# Altium PCB AMC_Single_uBIF.PcbDoc (part 2 of 2)
Units mm, origin at the board's own origin, x right, y up, seen from the top; angles counter-clockwise.
Board outline 54.63 x 82.6 mm, 4 copper layers (TOP, GND, PWR, BTM), stack 1.562 mm thick; 31 components, 112 nets, 322 pads, 154 vias.
Unrouted connection lines stored in the file: 186.
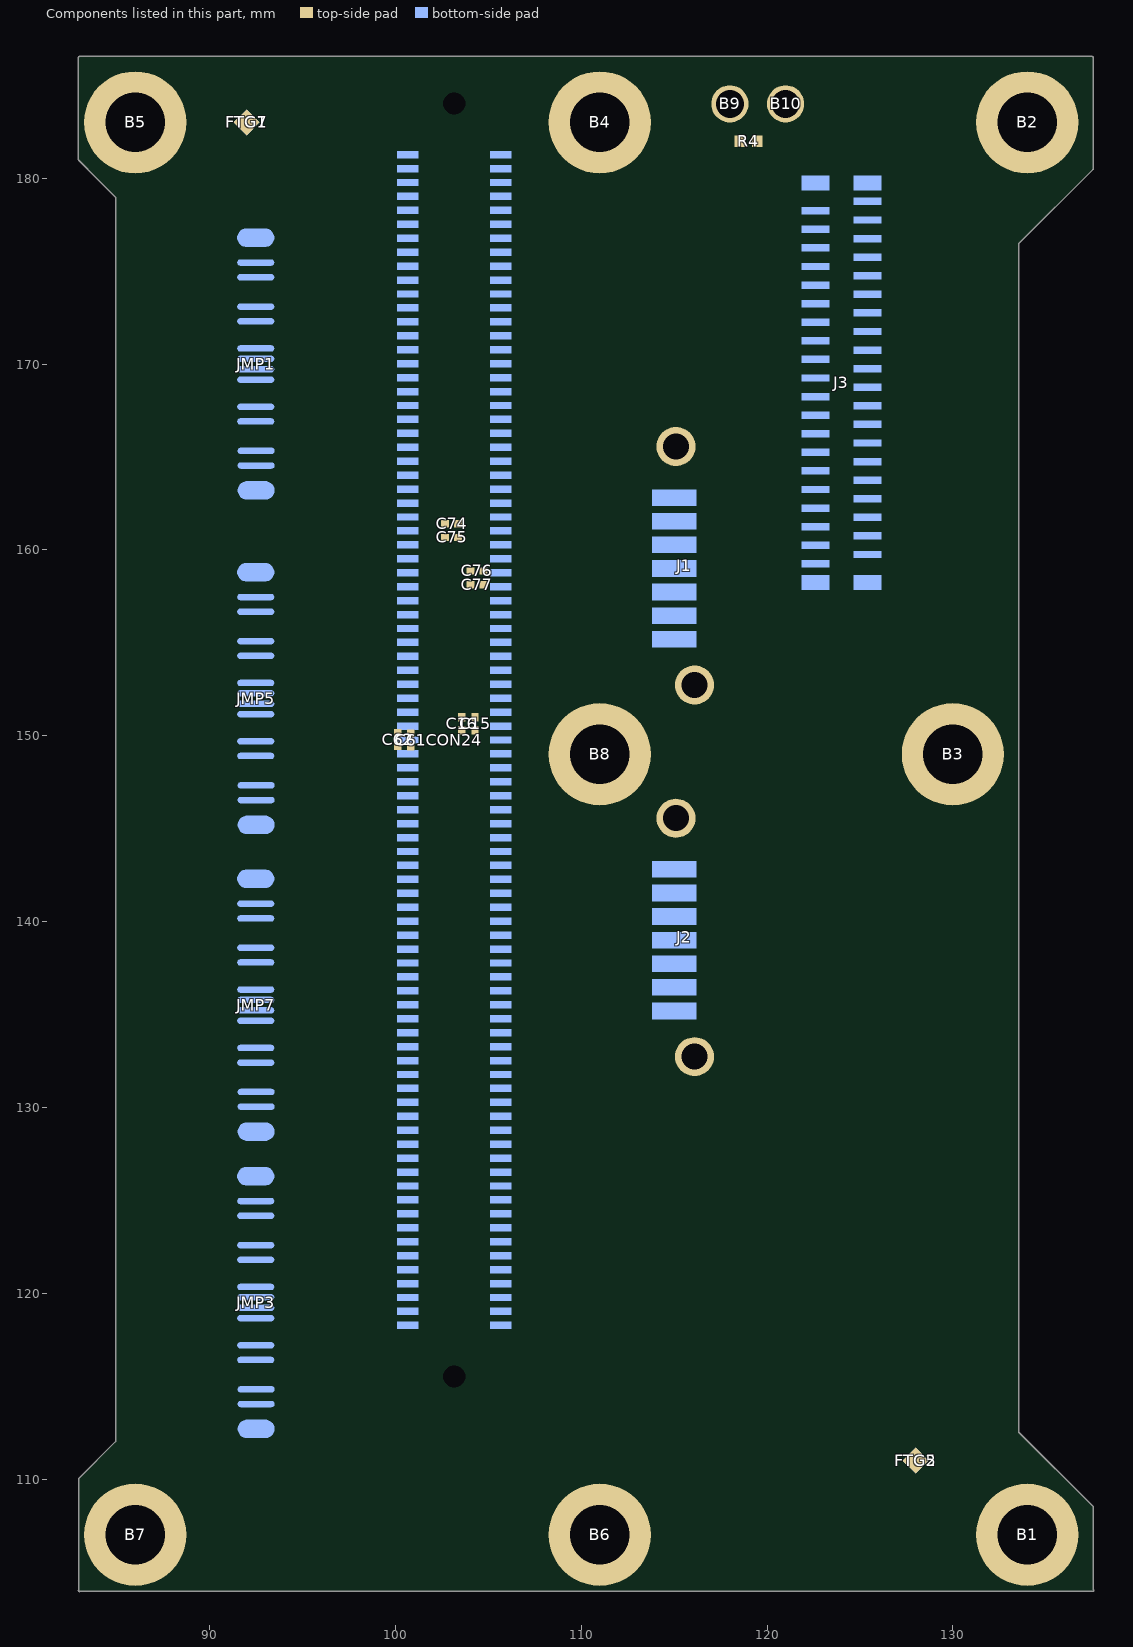
[diagram p4: the components of this part, seen from the top]

## Via types
v1: diameter 0.5, hole 0.3, TOP to BTM, tented both sides, 150 vias
v2: diameter 0.8, hole 0.5, TOP to BTM, tented both sides, 4 vias

## Nets (pads, with @x,y where several pads share a name; then routed paths per layer and width w, separated by ;. In a path a pad name is that pad's centre, name@x,y a point inside that pad or via, vN(x,y) a via of type N, cw(c..) or ccw(c..) an arc to the next point about the centre after c; other vN are vias at no path point) (continued)
copper on no net: | length 447.8
  TOP w0.11: 98.533,155.927 ccw(c99.444,156.839) 99.444,155.55 101.58,155.55 ccw(c101.58,156.611) 102.33,155.86 ; 98.56,156.61 ccw(c99.216,156.61) 98.752,156.147 ccw(c99.444,156.839) 99.444,155.86 99.602,155.86 ccw(c99.602,156.007) 99.749,156.007 cw(c99.932,156.007) 99.932,156.19 100.176,156.19 cw(c100.176,156.007) 100.359,156.007 ccw(c100.506,156.007) 100.506,155.86 100.75,155.86 101.58,155.86 ccw(c101.58,156.611) 102.112,156.08 102.191,156.159 ccw(c101.637,156.713) 102.42,156.713 102.42,158.02 cw(c103.06,158.02) 102.437,158.165 cw(c103.06,158.02) 102.915,158.643 cw(c103.06,158.02) 103.06,158.66 103.562,158.66 ccw(c103.562,159.319) 104.028,158.853 ; 98.56,156.74 cw(c99.24,156.74) 98.759,157.221 98.828,157.289 cw(c99.264,156.853) 99.264,157.47 cw(c99.264,156.719) v1(99.795,157.25) ; 98.651,157.551 cw(c99.204,156.997) 99.204,157.78 99.264,157.78 ccw(c99.264,158.531) v1(99.795,158) ; 98.878,164.028 v1(99.48,164.028) ; 98.878,164.728 v1(99.48,164.728) ; 98.878,166.278 v1(99.48,166.278) ; 98.878,166.978 v1(99.48,166.978) ; v1(99.299,159.548) 99.307,159.556 cw(c99.77,159.094) 99.77,159.748 ccw(c99.77,160.54) 100.33,159.98 100.97,160.62 cw(c101.58,160.011) 101.58,160.873 102.232,160.873 cw(c102.232,160.207) 102.703,160.678 ; v1(99.299,160.258) 99.307,160.25 ccw(c99.77,160.712) 99.77,160.058 ccw(c99.77,160.54) 100.11,160.199 ; v1@99.342,163.89 ccw(c99.009,163.557) 99.009,164.028 ccw(c99.009,164.499) v1@99.342,164.166 ; v1@99.342,164.59 ccw(c99.009,164.257) 99.009,164.728 ccw(c99.009,165.199) v1@99.342,164.866 ; v1@99.342,166.14 ccw(c99.009,165.807) 99.009,166.278 ccw(c99.009,166.749) v1@99.342,166.416 ; v1@99.342,166.84 ccw(c99.009,166.507) 99.009,166.978 ccw(c99.009,167.449) v1@99.342,167.116 ; v1@99.388,159.721 ccw(c99.491,159.922) 99.603,159.727 ccw(c99.711,159.538) v1@99.494,159.543 ; v1@99.388,160.085 cw(c99.49,159.886) 99.602,160.079 cw(c99.71,160.267) v1@99.494,160.262 ; v1@99.602,157.227 ccw(c99.313,157.193) 99.459,157.444 ccw(c99.604,157.696) v1@99.718,157.429 ; v1@99.602,158.023 cw(c99.313,158.057) 99.458,157.805 cw(c99.604,157.553) v1@99.718,157.821 ; 100.111,160.199 100.752,160.84 cw(c101.58,160.012) 101.58,161.183 102.232,161.183 ccw(c102.232,161.849) 102.703,161.378 ; 102.331,155.861 102.41,155.94 ccw(c101.637,156.713) 102.73,156.713 102.73,158.02 cw(c103.06,158.02) 103.06,158.35 103.552,158.35 cw(c103.552,157.677) 104.027,158.154 ; 103.403,160.678 cw(c103.89,160.19) 103.89,160.88 104.87,160.88 ccw(c104.87,162.156) 105.772,161.254 107.352,162.834 ccw(c106.416,163.77) 107.74,163.77 107.74,164.36 cw(c108.875,164.36) 108.072,165.162 ; 103.403,161.378 ccw(c103.856,161.832) 103.856,161.19 104.87,161.19 ccw(c104.87,162.156) 105.553,161.473 107.133,163.053 ccw(c106.416,163.77) 107.43,163.77 107.43,164.36 cw(c108.875,164.36) 107.853,165.382 108.036,165.564 cw(c108.919,164.681) 108.037,165.566 cw(c108.919,164.681) 108.919,165.93 ; 104.728,158.153 cw(c105.198,157.682) 105.198,158.348 105.37,158.348 ccw(c105.37,159.381) 106.1,158.65 ; 104.728,158.853 ccw(c105.198,159.324) 105.198,158.658 105.37,158.658 ccw(c105.37,159.381) 105.881,158.87 106.939,159.927 ; 106.101,158.651 107.158,159.708 ccw(c106.236,160.63) 107.54,160.63 cw(c108.433,160.63) 107.802,161.262 108.083,161.543 ; 106.939,159.928 ccw(c106.236,160.63) 107.23,160.63 cw(c108.433,160.63) 107.582,161.48 107.864,161.763 cw(c108.71,160.917) 108.71,162.113
  TOP w0.6: 98.46,179.6 99.04,179.02 v1(99.673,179.02)
  TOP w0.7: 104.753,177.853 v2(103.27,177.853) v2(103.27,179.123) ; 104.753,179.123 v2(103.27,179.123) ; 104.753,180.393 v2(103.27,180.393) ; 104.753,181.663 102.523,181.663 102.1,181.24 v2(102.1,180.393) v2(103.27,180.393) ; v2(103.27,179.123) v2(103.27,180.393)
  BTM w0.11: 98.878,164.028 v1(99.48,164.028) 99.551,164.099 cw(c99.85,163.8) 99.85,164.223 100.107,164.223 ; 98.878,164.728 v1(99.48,164.728) 99.551,164.657 ccw(c99.85,164.955) 99.85,164.533 100.093,164.533 ; 98.878,166.278 v1(99.48,166.278) 99.516,166.314 cw(c99.9,165.93) 99.9,166.473 cw(c99.9,165.997) 100.236,166.334 100.3,166.27 100.674,166.27 ; 98.878,166.978 v1(99.48,166.978) v1@99.516,166.942 ; v1(99.299,159.548) cw(c99.782,159.065) 99.782,159.748 99.96,159.748 cw(c99.96,159.381) 100.219,159.641 100.34,159.52 100.674,159.52 ; v1(99.299,160.258) ccw(c99.782,160.741) 99.782,160.058 99.95,160.058 ccw(c99.95,160.463) 100.236,160.176 ; v1@99.342,163.89 ccw(c99.009,163.557) 99.009,164.028 ccw(c99.009,164.499) v1@99.342,164.166 ; v1@99.342,164.59 ccw(c99.009,164.257) 99.009,164.728 ccw(c99.009,165.199) v1@99.342,164.866 ; v1@99.342,166.14 ccw(c99.009,165.807) 99.009,166.278 ccw(c99.009,166.749) v1@99.342,166.416 ; v1@99.342,166.84 ccw(c99.009,166.507) 99.009,166.978 ccw(c99.009,167.449) v1@99.342,167.116 ; v1@99.39,159.72 ccw(c99.494,159.918) 99.605,159.725 ccw(c99.716,159.532) v1@99.494,159.54 ; v1@99.39,160.085 cw(c99.494,159.888) 99.605,160.081 cw(c99.716,160.274) v1@99.494,160.266 ; v1@99.516,166.942 ccw(c99.9,167.326) 99.9,166.783 99.96,166.783 ccw(c99.96,167.08) 100.17,166.87 100.32,167.02 100.674,167.02 ; v1@99.559,164.206 ccw(c99.647,164.402) 99.754,164.216 ccw(c99.836,164.074) v1@99.673,164.053 ; v1@99.56,164.55 cw(c99.647,164.355) 99.754,164.54 cw(c99.835,164.681) v1@99.673,164.703 ; v1@99.567,166.452 ccw(c99.661,166.64) 99.766,166.458 ccw(c99.858,166.3) v1@99.675,166.289 ; v1@99.567,166.804 cw(c99.661,166.615) 99.766,166.798 cw(c99.858,166.957) v1@99.675,166.967 ; v1(99.795,157.25) 99.981,157.25 v1@100.001,157.27 ; v1(99.795,158) 99.981,158 v1@100.001,158.02 ; v1(99.798,170.774) 100.028,170.774 v1@100.032,170.77 ; v1(99.798,171.52) v1@100.032,171.52 ; v1(99.798,173.024) 100.028,173.024 v1@100.032,173.02 ; v1(99.798,173.77) v1@100.032,173.77 ; v1@99.855,157.19 cw(c100.049,156.997) 100.049,157.27 ; v1@99.855,157.94 cw(c100.049,157.747) 100.049,158.02 ; v1@99.933,157.112 cw(c100.314,156.731) 100.314,157.27 ; v1@99.933,157.388 ccw(c100.218,157.672) 100.218,157.27 ; v1@99.933,157.862 cw(c100.314,157.481) 100.314,158.02 ; v1@99.933,158.138 ccw(c100.218,158.422) 100.218,158.02 ; v1@99.936,170.636 cw(c100.259,170.314) 100.259,170.77 ; v1@99.936,170.912 ccw(c100.279,171.255) 100.279,170.77 ; v1@99.936,171.382 cw(c100.269,171.049) 100.269,171.52 cw(c100.269,171.991) v1@99.936,171.658 ; v1@99.936,172.886 cw(c100.259,172.564) 100.259,173.02 ; v1@99.936,173.162 ccw(c100.279,173.505) 100.279,173.02 ; v1@99.936,173.632 cw(c100.269,173.299) 100.269,173.77 cw(c100.269,174.241) v1@99.936,173.908 ; 100.104,164.544 cw(c100.299,164.35) 100.299,164.625 ; 100.157,164.051 ccw(c99.975,164.091) 100.107,164.223 ; 100.157,164.742 cw(c99.929,164.697) 100.093,164.533 ; 100.177,170.691 ccw(c100.032,170.596) v1@100.032,170.77 ; 100.177,170.849 cw(c100.032,170.944) v1@100.032,170.77 ; 100.177,171.441 ccw(c100.032,171.346) v1@100.032,171.52 ; 100.177,171.599 cw(c100.032,171.694) v1@100.032,171.52 ; 100.177,172.941 ccw(c100.032,172.846) v1@100.032,173.02 ; 100.177,173.099 cw(c100.032,173.194) v1@100.032,173.02 ; 100.177,173.691 ccw(c100.032,173.596) v1@100.032,173.77 ; 100.177,173.849 cw(c100.032,173.944) v1@100.032,173.77 ; 100.185,157.18 ccw(c100.001,157.036) v1@100.001,157.27 ; 100.185,157.36 cw(c100.001,157.504) v1@100.001,157.27 ; 100.185,157.93 ccw(c100.001,157.786) v1@100.001,158.02 ; 100.185,158.11 cw(c100.001,158.254) v1@100.001,158.02 ; 100.237,160.177 100.33,160.27 100.674,160.27 ; 100.28,164.164 cw(c100.254,164.37) 100.107,164.223 ; 100.674,157.27 v1@100.001,157.27 ; 100.674,158.02 v1@100.001,158.02 ; 100.674,164.02 100.31,164.02 100.107,164.223 ; 100.674,164.77 100.33,164.77 100.093,164.533 ; 100.674,170.77 v1@100.032,170.77 ; 100.674,171.52 v1@100.032,171.52 ; 100.674,173.02 v1@100.032,173.02 ; 100.674,173.77 v1@100.032,173.77 ; v1(104.743,128.02) 105.674,128.02 ; v1(104.743,128.77) 105.674,128.77 ; v1(104.743,132.52) 105.674,132.52 ; v1(104.743,133.27) 105.674,133.27 ; v1(104.743,137.02) 105.674,137.02 ; v1(104.743,137.77) 105.674,137.77 ; v1(104.743,141.52) 105.674,141.52 ; v1(104.743,142.27) 105.674,142.27 ; v1(104.743,146.02) 105.674,146.02 ; v1(104.743,146.77) 105.674,146.77 ; v1(104.795,159.54) 104.981,159.54 v1@105.001,159.52 ; v1(104.795,160.25) 104.981,160.25 v1@105.001,160.27 ; v1(104.795,161.79) 104.981,161.79 v1@105.001,161.77 ; v1(104.795,162.5) 104.981,162.5 v1@105.001,162.52 ; v1(104.795,164.04) 104.981,164.04 v1@105.001,164.02 ; v1(104.795,164.75) 104.981,164.75 v1@105.001,164.77 ; v1(104.795,166.29) 104.981,166.29 v1@105.001,166.27 ; v1(104.795,167) 104.981,167 v1@105.001,167.02 ; v1(104.795,168.54) 104.981,168.54 v1@105.001,168.52 ; v1(104.795,169.25) 104.981,169.25 v1@105.001,169.27 ; v1(104.795,170.79) 104.981,170.79 v1@105.001,170.77 ; v1(104.795,171.5) 104.981,171.5 v1@105.001,171.52 ; v1(104.795,173.04) 104.981,173.04 v1@105.001,173.02 ; v1(104.795,173.75) 104.981,173.75 v1@105.001,173.77 ; v1(104.795,175.29) 104.981,175.29 v1@105.001,175.27 ; v1(104.795,176) 104.981,176 v1@105.001,176.02 ; v1@104.855,159.6 ccw(c105.049,159.793) 105.049,159.52 ; v1@104.855,160.19 cw(c105.049,159.997) 105.049,160.27 ; v1@104.855,161.85 ccw(c105.049,162.043) 105.049,161.77 ; v1@104.855,162.44 cw(c105.049,162.247) 105.049,162.52 ; v1@104.855,164.1 ccw(c105.049,164.293) 105.049,164.02 ; v1@104.855,164.69 cw(c105.049,164.497) 105.049,164.77 ; v1@104.855,166.94 cw(c105.049,166.747) 105.049,167.02 ; v1@104.855,169.19 cw(c105.049,168.997) 105.049,169.27 ; v1@104.855,170.85 ccw(c105.049,171.043) 105.049,170.77 ; v1@104.855,171.44 cw(c105.049,171.247) 105.049,171.52 ; v1@104.855,173.1 ccw(c105.049,173.293) 105.049,173.02 ; v1@104.855,175.94 cw(c105.049,175.747) 105.049,176.02 ; v1@104.881,127.882 cw(c105.214,127.549) 105.214,128.02 cw(c105.214,128.491) v1@104.881,128.158 ; v1@104.881,128.632 cw(c105.214,128.299) 105.214,128.77 cw(c105.214,129.241) v1@104.881,128.908 ; v1@104.881,132.382 cw(c105.214,132.049) 105.214,132.52 cw(c105.214,132.991) v1@104.881,132.658 ; v1@104.881,133.132 cw(c105.214,132.799) 105.214,133.27 cw(c105.214,133.741) v1@104.881,133.408 ; v1@104.881,136.882 cw(c105.214,136.549) 105.214,137.02 cw(c105.214,137.491) v1@104.881,137.158 ; v1@104.881,137.632 cw(c105.214,137.299) 105.214,137.77 cw(c105.214,138.241) v1@104.881,137.908 ; v1@104.881,141.382 cw(c105.214,141.049) 105.214,141.52 cw(c105.214,141.991) v1@104.881,141.658 ; v1@104.881,142.132 cw(c105.214,141.799) 105.214,142.27 cw(c105.214,142.741) v1@104.881,142.408 ; v1@104.881,145.882 cw(c105.214,145.549) 105.214,146.02 cw(c105.214,146.491) v1@104.881,146.158 ; v1@104.881,146.632 cw(c105.214,146.299) 105.214,146.77 cw(c105.214,147.241) v1@104.881,146.908 ; v1@104.933,159.402 cw(c105.218,159.118) 105.218,159.52 ; v1@104.933,159.678 ccw(c105.314,160.059) 105.314,159.52 ; v1@104.933,160.112 cw(c105.314,159.731) 105.314,160.27 ; v1@104.933,160.388 ccw(c105.218,160.672) 105.218,160.27 ; v1@104.933,161.652 cw(c105.218,161.368) 105.218,161.77 ; v1@104.933,161.928 ccw(c105.314,162.309) 105.314,161.77 ; v1@104.933,162.362 cw(c105.314,161.981) 105.314,162.52 ; v1@104.933,162.638 ccw(c105.218,162.922) 105.218,162.52 ; v1@104.933,163.902 cw(c105.218,163.618) 105.218,164.02 ; v1@104.933,164.178 ccw(c105.314,164.559) 105.314,164.02 ; v1@104.933,164.612 cw(c105.314,164.231) 105.314,164.77 ; v1@104.933,164.888 ccw(c105.218,165.172) 105.218,164.77 ; v1@104.933,166.152 cw(c105.218,165.868) 105.218,166.27 ; v1@104.933,166.428 ccw(c105.314,166.809) 105.314,166.27 ; v1@104.933,166.862 cw(c105.314,166.481) 105.314,167.02 ; v1@104.933,167.138 ccw(c105.218,167.422) 105.218,167.02 ; v1@104.933,168.402 cw(c105.218,168.118) 105.218,168.52 ; v1@104.933,168.678 ccw(c105.314,169.059) 105.314,168.52 ; v1@104.933,169.112 cw(c105.314,168.731) 105.314,169.27 ; v1@104.933,169.388 ccw(c105.218,169.672) 105.218,169.27 ; v1@104.933,170.652 cw(c105.218,170.368) 105.218,170.77 ; v1@104.933,170.928 ccw(c105.314,171.309) 105.314,170.77 ; v1@104.933,171.362 cw(c105.314,170.981) 105.314,171.52 ; v1@104.933,171.638 ccw(c105.218,171.922) 105.218,171.52 ; v1@104.933,172.902 cw(c105.218,172.618) 105.218,173.02 ; v1@104.933,173.178 ccw(c105.314,173.559) 105.314,173.02 ; v1@104.933,173.612 cw(c105.314,173.231) 105.314,173.77 ; v1@104.933,173.888 ccw(c105.218,174.172) 105.218,173.77 ; v1@104.933,175.152 cw(c105.218,174.868) 105.218,175.27 ; v1@104.933,175.428 ccw(c105.314,175.809) 105.314,175.27 ; v1@104.933,175.862 cw(c105.314,175.481) 105.314,176.02 ; v1@104.933,176.138 ccw(c105.218,176.422) 105.218,176.02 ; 105.185,159.43 ccw(c105.001,159.286) v1@105.001,159.52 ; 105.185,159.61 cw(c105.001,159.754) v1@105.001,159.52 ; 105.185,160.18 ccw(c105.001,160.036) v1@105.001,160.27 ; 105.185,160.36 cw(c105.001,160.504) v1@105.001,160.27 ; 105.185,161.68 ccw(c105.001,161.536) v1@105.001,161.77 ; 105.185,161.86 cw(c105.001,162.004) v1@105.001,161.77 ; 105.185,162.43 ccw(c105.001,162.286) v1@105.001,162.52 ; 105.185,162.61 cw(c105.001,162.754) v1@105.001,162.52 ; 105.185,163.93 ccw(c105.001,163.786) v1@105.001,164.02 ; 105.185,164.11 cw(c105.001,164.254) v1@105.001,164.02 ; 105.185,164.68 ccw(c105.001,164.536) v1@105.001,164.77 ; 105.185,164.86 cw(c105.001,165.004) v1@105.001,164.77 ; 105.185,166.18 ccw(c105.001,166.036) v1@105.001,166.27 ; 105.185,166.36 cw(c105.001,166.504) v1@105.001,166.27 ; 105.185,166.93 ccw(c105.001,166.786) v1@105.001,167.02 ; 105.185,167.11 cw(c105.001,167.254) v1@105.001,167.02 ; 105.185,168.43 ccw(c105.001,168.286) v1@105.001,168.52 ; 105.185,168.61 cw(c105.001,168.754) v1@105.001,168.52 ; 105.185,169.18 ccw(c105.001,169.036) v1@105.001,169.27 ; 105.185,169.36 cw(c105.001,169.504) v1@105.001,169.27 ; 105.185,170.68 ccw(c105.001,170.536) v1@105.001,170.77 ; 105.185,170.86 cw(c105.001,171.004) v1@105.001,170.77 ; 105.185,171.43 ccw(c105.001,171.286) v1@105.001,171.52 ; 105.185,171.61 cw(c105.001,171.754) v1@105.001,171.52 ; 105.185,172.93 ccw(c105.001,172.786) v1@105.001,173.02 ; 105.185,173.11 cw(c105.001,173.254) v1@105.001,173.02 ; 105.185,173.68 ccw(c105.001,173.536) v1@105.001,173.77 ; 105.185,173.86 cw(c105.001,174.004) v1@105.001,173.77 ; 105.185,175.18 ccw(c105.001,175.036) v1@105.001,175.27 ; 105.185,175.36 cw(c105.001,175.504) v1@105.001,175.27 ; 105.185,175.93 ccw(c105.001,175.786) v1@105.001,176.02 ; 105.185,176.11 cw(c105.001,176.254) v1@105.001,176.02 ; 105.196,127.917 ccw(c104.949,127.67) 104.949,128.02 ccw(c104.949,128.37) 105.196,128.123 ; 105.196,128.667 ccw(c104.949,128.42) 104.949,128.77 ccw(c104.949,129.12) 105.196,128.873 ; 105.196,132.417 ccw(c104.949,132.17) 104.949,132.52 ccw(c104.949,132.87) 105.196,132.623 ; 105.196,133.167 ccw(c104.949,132.92) 104.949,133.27 ccw(c104.949,133.62) 105.196,133.373 ; 105.196,136.917 ccw(c104.949,136.67) 104.949,137.02 ccw(c104.949,137.37) 105.196,137.123 ; 105.196,137.667 ccw(c104.949,137.42) 104.949,137.77 ccw(c104.949,138.12) 105.196,137.873 ; 105.196,141.417 ccw(c104.949,141.17) 104.949,141.52 ccw(c104.949,141.87) 105.196,141.623 ; 105.196,142.167 ccw(c104.949,141.92) 104.949,142.27 ccw(c104.949,142.62) 105.196,142.373 ; 105.196,145.917 ccw(c104.949,145.67) 104.949,146.02 ccw(c104.949,146.37) 105.196,146.123 ; 105.196,146.667 ccw(c104.949,146.42) 104.949,146.77 ccw(c104.949,147.12) 105.196,146.873 ; 105.674,119.02 v1(106.605,119.02) ; 105.674,119.77 v1(106.605,119.77) ; 105.674,121.27 v1(106.605,121.27) ; 105.674,122.02 v1(106.605,122.02) ; 105.674,123.52 v1(106.605,123.52) ; 105.674,124.27 v1(106.605,124.27) ; 105.674,125.77 v1(106.605,125.77) ; 105.674,126.52 v1(106.605,126.52) ; 105.674,130.27 v1(106.605,130.27) ; 105.674,131.02 v1(106.605,131.02) ; 105.674,134.77 v1(106.605,134.77) ; 105.674,135.52 v1(106.605,135.52) ; 105.674,139.27 v1(106.605,139.27) ; 105.674,140.02 v1(106.605,140.02) ; 105.674,143.77 v1(106.605,143.77) ; 105.674,144.52 v1(106.605,144.52) ; 105.674,148.27 v1(106.605,148.27) ; 105.674,149.02 v1(106.605,149.02) ; 105.674,150.52 106.08,150.52 106.3,150.74 107.809,150.74 ; 105.674,151.27 106.06,151.27 106.28,151.05 107.809,151.05 ; 105.674,152.77 v1(106.605,152.77) ; 105.674,153.52 v1(106.605,153.52) ; 106.049,166.875 cw(c106.049,166.619) 106.23,166.8 ; 106.049,169.125 cw(c106.049,168.845) 106.247,169.043 ; 106.049,171.375 cw(c106.049,171.047) 106.281,171.279 ; 106.049,173.625 cw(c106.049,173.321) 106.264,173.536 ; 106.049,175.875 cw(c106.049,175.595) 106.247,175.793 ; 106.059,161.915 ccw(c106.077,162.173) 106.26,161.99 ; 106.059,162.375 cw(c106.077,162.117) 106.26,162.3 ; 106.151,118.917 cw(c106.399,118.67) 106.399,119.02 cw(c106.399,119.37) 106.151,119.123 ; 106.151,119.667 cw(c106.399,119.42) 106.399,119.77 cw(c106.399,120.12) 106.151,119.873 ; 106.151,121.167 cw(c106.399,120.92) 106.399,121.27 cw(c106.399,121.62) 106.151,121.373 ; 106.151,121.917 cw(c106.399,121.67) 106.399,122.02 cw(c106.399,122.37) 106.151,122.123 ; 106.151,123.417 cw(c106.399,123.17) 106.399,123.52 cw(c106.399,123.87) 106.151,123.623 ; 106.151,124.167 cw(c106.399,123.92) 106.399,124.27 cw(c106.399,124.62) 106.151,124.373 ; 106.151,125.667 cw(c106.399,125.42) 106.399,125.77 cw(c106.399,126.12) 106.151,125.873 ; 106.151,126.417 cw(c106.399,126.17) 106.399,126.52 cw(c106.399,126.87) 106.151,126.623 ; 106.151,130.167 cw(c106.399,129.92) 106.399,130.27 cw(c106.399,130.62) 106.151,130.373 ; 106.151,130.917 cw(c106.399,130.67) 106.399,131.02 cw(c106.399,131.37) 106.151,131.123 ; 106.151,134.667 cw(c106.399,134.42) 106.399,134.77 cw(c106.399,135.12) 106.151,134.873 ; 106.151,135.417 cw(c106.399,135.17) 106.399,135.52 cw(c106.399,135.87) 106.151,135.623 ; 106.151,139.167 cw(c106.399,138.92) 106.399,139.27 cw(c106.399,139.62) 106.151,139.373 ; 106.151,139.917 cw(c106.399,139.67) 106.399,140.02 cw(c106.399,140.37) 106.151,140.123 ; 106.151,143.667 cw(c106.399,143.42) 106.399,143.77 cw(c106.399,144.12) 106.151,143.873 ; 106.151,144.417 cw(c106.399,144.17) 106.399,144.52 cw(c106.399,144.87) 106.151,144.623 ; 106.151,148.167 cw(c106.399,147.92) 106.399,148.27 cw(c106.399,148.62) 106.151,148.373 ; 106.151,148.917 cw(c106.399,148.67) 106.399,149.02 cw(c106.399,149.37) 106.151,149.123 ; 106.151,152.667 cw(c106.399,152.42) 106.399,152.77 cw(c106.399,153.12) 106.151,152.873 ; 106.151,153.417 cw(c106.399,153.17) 106.399,153.52 cw(c106.399,153.87) 106.151,153.623 ; 106.191,166.989 ccw(c106.414,166.939) 106.252,166.778 ; 106.192,169.246 ccw(c106.439,169.205) 106.262,169.028 ; 106.193,161.79 cw(c106.428,161.822) 106.26,161.99 ; 106.193,162.5 ccw(c106.428,162.468) 106.26,162.3 ; 106.194,171.511 ccw(c106.497,171.493) 106.282,171.278 ; 106.193,173.754 ccw(c106.467,173.723) 106.272,173.528 ; 106.193,176.008 ccw(c106.516,175.982) 106.287,175.753 ; v1@106.467,118.882 ccw(c106.134,118.549) 106.134,119.02 ccw(c106.134,119.491) v1@106.467,119.158 ; v1@106.467,119.632 ccw(c106.134,119.299) 106.134,119.77 ccw(c106.134,120.241) v1@106.467,119.908 ; v1@106.467,121.132 ccw(c106.134,120.799) 106.134,121.27 ccw(c106.134,121.741) v1@106.467,121.408 ; v1@106.467,121.882 ccw(c106.134,121.549) 106.134,122.02 ccw(c106.134,122.491) v1@106.467,122.158 ; v1@106.467,123.382 ccw(c106.134,123.049) 106.134,123.52 ccw(c106.134,123.991) v1@106.467,123.658 ; v1@106.467,124.132 ccw(c106.134,123.799) 106.134,124.27 ccw(c106.134,124.741) v1@106.467,124.408 ; v1@106.467,125.632 ccw(c106.134,125.299) 106.134,125.77 ccw(c106.134,126.241) v1@106.467,125.908 ; v1@106.467,126.382 ccw(c106.134,126.049) 106.134,126.52 ccw(c106.134,126.991) v1@106.467,126.658 ; v1@106.467,130.132 ccw(c106.134,129.799) 106.134,130.27 ccw(c106.134,130.741) v1@106.467,130.408 ; v1@106.467,130.882 ccw(c106.134,130.549) 106.134,131.02 ccw(c106.134,131.491) v1@106.467,131.158 ; v1@106.467,134.632 ccw(c106.134,134.299) 106.134,134.77 ccw(c106.134,135.241) v1@106.467,134.908 ; v1@106.467,135.382 ccw(c106.134,135.049) 106.134,135.52 ccw(c106.134,135.991) v1@106.467,135.658 ; v1@106.467,139.132 ccw(c106.134,138.799) 106.134,139.27 ccw(c106.134,139.741) v1@106.467,139.408 ; v1@106.467,139.882 ccw(c106.134,139.549) 106.134,140.02 ccw(c106.134,140.491) v1@106.467,140.158 ; v1@106.467,143.632 ccw(c106.134,143.299) 106.134,143.77 ccw(c106.134,144.241) v1@106.467,143.908 ; v1@106.467,144.382 ccw(c106.134,144.049) 106.134,144.52 ccw(c106.134,144.991) v1@106.467,144.658 ; v1@106.467,148.132 ccw(c106.134,147.799) 106.134,148.27 ccw(c106.134,148.741) v1@106.467,148.408 ; v1@106.467,148.882 ccw(c106.134,148.549) 106.134,149.02 ccw(c106.134,149.491) v1@106.467,149.158 ; v1@106.467,152.632 ccw(c106.134,152.299) 106.134,152.77 ccw(c106.134,153.241) v1@106.467,152.908 ; v1@106.467,153.382 ccw(c106.134,153.049) 106.134,153.52 ccw(c106.134,153.991) v1@106.467,153.658 ; 107.539,161.792 ccw(c107.06,161.313) 107.06,161.99 106.26,161.99 ; 107.539,161.792 107.678,161.653 ; 107.548,170.782 ccw(c107.1,170.334) 107.1,170.968 106.288,170.968 106.09,170.77 105.674,170.77 v1@105.001,170.77 ; 107.548,171.464 cw(c107.1,171.912) 107.1,171.278 106.282,171.278 ; 107.555,164.026 ccw(c107.09,163.56) 107.09,164.218 106.288,164.218 106.09,164.02 105.674,164.02 v1@105.001,164.02 ; 107.555,164.72 cw(c107.09,165.186) 107.09,164.528 106.292,164.528 106.05,164.77 105.674,164.77 v1@105.001,164.77 ; 107.555,166.276 ccw(c107.09,165.81) 107.09,166.468 106.268,166.468 106.07,166.27 105.674,166.27 v1@105.001,166.27 ; 107.555,164.025 107.678,163.903 ; 107.555,164.721 107.678,164.843 ; 107.555,166.275 107.678,166.153 ; 107.59,175.215 ccw(c107.04,174.664) 107.04,175.443 106.293,175.443 106.12,175.27 105.674,175.27 v1@105.001,175.27 ; 107.591,175.215 107.678,175.128 ; 107.607,162.522 cw(c107.07,163.06) 107.07,162.3 106.26,162.3 ; 107.607,162.523 107.678,162.593 ; 107.678,159.433 107.534,159.576 ccw(c107.12,159.162) 107.12,159.748 106.288,159.748 106.06,159.52 105.674,159.52 v1@105.001,159.52 ; 107.678,160.373 107.563,160.258 cw(c107.08,160.74) 107.08,160.058 106.282,160.058 106.07,160.27 105.674,160.27 v1@105.001,160.27 ; 107.678,167.093 107.541,166.957 cw(c107.11,167.388) 107.11,166.778 106.252,166.778 ; 107.678,168.403 107.563,168.518 ccw(c107.08,168.036) 107.08,168.718 106.258,168.718 106.06,168.52 105.674,168.52 v1@105.001,168.52 ; 107.678,169.343 107.541,169.207 cw(c107.11,169.638) 107.11,169.028 106.262,169.028 ; 107.678,172.903 107.57,173.011 ccw(c107.07,172.511) 107.07,173.218 106.278,173.218 106.08,173.02 105.674,173.02 v1@105.001,173.02 ; 107.678,173.843 107.584,173.749 cw(c107.05,174.283) 107.05,173.528 106.272,173.528 ; 107.678,176.068 107.57,175.96 cw(c107.07,176.459) 107.07,175.753 106.287,175.753 ; v1@105.001,161.77 105.674,161.77 106.04,161.77 106.26,161.99 ; v1@105.001,162.52 105.674,162.52 106.04,162.52 106.26,162.3 ; v1@105.001,167.02 105.674,167.02 106.01,167.02 106.252,166.778 ; v1@105.001,169.27 105.674,169.27 106.02,169.27 106.262,169.028 ; v1@105.001,171.52 105.674,171.52 106.04,171.52 106.282,171.278 ; v1@105.001,173.77 105.674,173.77 106.03,173.77 106.272,173.528 ; v1@105.001,176.02 105.674,176.02 106.02,176.02 106.287,175.753
  BTM w0.127: v1@99.312,117.864 ccw(c98.993,118.182) 99.444,118.182 ccw(c99.894,118.182) v1@99.576,117.864 ; v1(99.444,117.732) 99.444,119.546 ; v1(99.673,179.77) 100.674,179.77 ; v1@99.805,179.638 cw(c100.124,179.32) 100.124,179.77 cw(c100.124,180.22) v1@99.805,179.902 ; 99.969,179.77 cw(c99.969,179.44) 100.202,179.673 ; 100.674,151.27 v1@101.56,151.27 ; 101.145,151.173 cw(c101.378,150.94) 101.378,151.27 cw(c101.378,151.6) 101.145,151.367 ; v1@101.661,151.138 ccw(c101.342,150.82) 101.342,151.27 ccw(c101.342,151.72) v1@101.661,151.402 ; 105.674,177.52 106.525,177.52 v1(106.553,177.548) ; 105.674,178.27 107.166,178.27 v1(107.174,178.278) ; 105.674,179.02 v1@106.62,179.02 ; 105.674,179.77 107.191,179.77 v1(107.203,179.758) ; 105.674,180.52 106.62,180.52 v1(106.628,180.528) ; 106.035,177.52 ccw(c106.035,178.066) v1@106.421,177.68 ; 106.145,177.423 cw(c106.378,177.19) 106.378,177.52 cw(c106.378,177.85) 106.145,177.617 ; 106.145,178.173 cw(c106.378,177.94) 106.378,178.27 cw(c106.378,178.6) 106.145,178.367 ; 106.145,178.923 cw(c106.378,178.69) 106.378,179.02 cw(c106.378,179.35) 106.145,179.117 ; 106.145,179.673 cw(c106.378,179.44) 106.378,179.77 cw(c106.378,180.1) 106.145,179.867 ; 106.145,180.423 cw(c106.378,180.19) 106.378,180.52 cw(c106.378,180.85) 106.145,180.617 ; 106.158,179.02 ccw(c106.158,179.497) v1@106.496,179.16 ; 106.158,180.52 ccw(c106.158,180.997) v1@106.496,180.66 ; 106.17,177.52 cw(c106.17,177.165) v1@106.421,177.416 ; 106.197,179.02 cw(c106.197,178.597) v1@106.496,178.896 ; 106.197,180.52 cw(c106.197,180.097) v1@106.496,180.396 ; 106.704,178.27 ccw(c106.704,178.747) v1@107.042,178.41 ; 106.723,179.77 cw(c106.723,179.279) v1@107.071,179.626 ; 106.743,178.27 cw(c106.743,177.847) v1@107.042,178.146 ; 106.781,179.77 ccw(c106.781,180.179) v1@107.071,179.89
  BTM w0.2: 105.309,145.27 105.674,145.27
  BTM w0.3: 98,145.27 100.674,145.27 v1(101.674,145.27) ; 98,147.52 100.674,147.52 v1(101.674,147.52) ; v1(99.673,158.77) 100.674,158.77 v1(101.674,158.77) ; v1(99.673,167.77) 100.674,167.77 v1(101.674,167.77) ; v1(99.673,174.52) 100.674,174.52 v1(101.674,174.52) ; v1(99.673,176.77) 100.674,176.77 v1(101.674,176.77) ; v1(99.673,179.02) 100.674,179.02 ; v1(99.673,181.27) 100.674,181.27 ; 99.769,120.5 100.77,120.5 ; 100.674,118.27 v1(101.674,118.27) ; 100.674,122.77 v1(101.674,122.77) ; 100.674,125.02 v1(101.674,125.02) ; 100.674,127.27 v1(101.674,127.27) ; 100.674,129.52 v1(101.674,129.52) ; 100.674,131.77 v1(101.674,131.77) ; 100.674,134.02 v1(101.674,134.02) ; 100.674,136.27 v1(101.674,136.27) ; 100.674,138.52 v1(101.674,138.52) ; 100.674,140.77 v1(101.674,140.77) ; 100.674,143.02 v1(101.674,143.02) ; 100.674,149.77 v1(101.674,149.77) ; 100.674,152.02 v1(101.674,152.02) ; 100.674,154.27 v1(101.674,154.27) ; 100.674,156.52 v1(101.674,156.52) ; 100.674,161.02 99.48,161.02 99.2,161.3 99.2,162.2 99.52,162.52 100.674,162.52 101.48,162.52 101.674,162.714 v1(101.674,163.27) 100.674,163.27 ; 100.674,165.52 v1(101.674,165.52) ; 100.674,170.02 v1(101.674,170.02) ; 100.674,172.27 v1(101.674,172.27) ; v1(104.673,118.27) 105.674,118.27 v1(106.674,118.27) ; v1(104.673,120.52) 105.674,120.52 v1(106.674,120.52) ; v1(104.673,122.77) 105.674,122.77 v1(106.674,122.77) ; v1(104.673,127.27) 105.674,127.27 v1(106.674,127.27) ; v1(104.673,129.52) 105.674,129.52 v1(106.674,129.52) ; v1(104.673,131.77) 105.674,131.77 v1(106.674,131.77) ; v1(104.673,134.02) 105.674,134.02 v1(106.674,134.02) ; v1(104.673,136.27) 105.674,136.27 v1(106.674,136.27) ; v1(104.673,138.52) 105.674,138.52 v1(106.674,138.52) ; v1(104.673,140.77) 105.674,140.77 v1(106.674,140.77) ; v1(104.673,143.02) 105.674,143.02 v1(106.674,143.02) ; v1(104.673,145.27) 105.309,145.27 ; v1(104.673,147.52) 105.674,147.52 v1(107.18,147.52) 107.18,145.864 106.586,145.27 105.674,145.27 ; v1(104.673,154.27) 105.674,154.27 108.37,154.27 ; v1(104.673,156.52) 105.674,156.52 v1(106.674,156.52) ; v1(104.673,163.27) 105.674,163.27 ; v1(104.673,165.52) 105.674,165.52 v1(106.674,165.52) ; v1(104.673,167.77) 105.674,167.77 v1(106.674,167.77) ; v1(104.673,170.02) 105.674,170.02 v1(106.674,170.02) ; v1(104.673,172.27) 105.674,172.27 v1(106.674,172.27) ; v1(104.673,174.52) 105.674,174.52 v1(106.674,174.52) ; v1(104.673,176.77) 105.674,176.77 v1(106.674,176.77) ; 105.674,125.02 v1(106.674,125.02) ; 105.674,149.77 v1(106.674,149.77) ; 105.674,152.02 v1(106.674,152.02) ; 105.674,158.77 v1(107.05,158.77) ; 105.674,161.02 v1(106.674,161.02) ; 105.674,181.27 v1(106.674,181.27)
  BTM w0.4: 100.674,119.02 102.04,119.02 102.67,119.65 102.67,127.33 101.98,128.02 ; 100.674,128.02 101.98,128.02 ; 100.674,139.27 101.99,139.27 102.73,138.53 102.73,128.77 101.98,128.02 ; 100.674,150.52 102.32,150.52 ; 100.674,161.77 102.03,161.77 102.89,160.91 102.89,151.09 102.32,150.52 ; 100.674,168.52 102.02,168.52 ; 100.674,175.27 102,175.27 ; 100.674,180.52 101.973,180.52 v2(102.1,180.393) v2(103.27,180.393) v2(103.27,179.123) v2(103.27,177.853) 103.27,176.54 102,175.27 ; 101.31,180.52 cw(c101.31,179.603) v2@101.959,180.252 ; 101.993,139.267 102.848,140.123 102.848,149.992 102.32,150.52 ; 102.01,161.79 102.91,162.69 102.91,167.63 102.02,168.52 ; v2@102.241,180.252 cw(c102.583,179.91) 102.583,180.393 cw(c102.583,180.876) v2@102.241,180.534 ; v2@103.129,177.712 cw(c102.787,177.37) 103.27,177.37 cw(c103.753,177.37) v2@103.411,177.712 ; v2@103.129,177.994 ccw(c102.787,178.336) 103.27,178.336 ccw(c103.753,178.336) v2@103.411,177.994 ; v2@103.129,178.982 cw(c102.787,178.64) 103.27,178.64 cw(c103.753,178.64) v2@103.411,178.982 ; v2@103.129,179.264 ccw(c102.787,179.606) 103.27,179.606 ccw(c103.753,179.606) v2@103.411,179.264 ; v2@103.129,180.534 cw(c102.787,180.876) 102.787,180.393 cw(c102.787,179.91) 103.129,180.252 cw(c102.787,179.91) 103.27,179.91 cw(c103.753,179.91) v2@103.411,180.252 ; 102,175.27 102.94,174.33 102.94,169.44 102.02,168.52
  other v1: 108.8,138.1 112.9,138.1 99,149.9 101.793,151.27 99.6,154.8 98.5,159.9 106.628,179.028

## Polygon pours and split planes (outlines as drawn)
GND on GND (split plane): 137.04,180.691 133.189,176.84 133.126,176.763 133.079,176.674 133.05,176.579 133.04,176.479 133.04,112.521 133.05,112.421 133.079,112.326 133.126,112.237 133.189,112.16 137.04,108.309 137.04,104.471 83.471,104.471 83.471,109.821 85.311,111.66 85.374,111.737 85.421,111.826 85.45,111.921 85.46,112.021 85.46,178.979 85.45,179.079 85.421,179.174 85.374,179.263 85.311,179.34 84.328,180.323 84.354,180.348 84.352,180.352 84.348,180.354 84.323,180.328 83.46,181.191 83.46,186.04 137.04,186.04
GND on PWR (split plane): 137.04,180.691 133.189,176.84 133.126,176.763 133.079,176.674 133.05,176.579 133.04,176.479 133.04,112.521 133.05,112.421 133.079,112.326 133.126,112.237 133.189,112.16 137.04,108.309 137.04,104.471 83.471,104.471 83.471,109.821 85.311,111.66 85.374,111.737 85.421,111.826 85.45,111.921 85.46,112.021 85.46,178.979 85.45,179.079 85.421,179.174 85.374,179.263 85.311,179.34 84.328,180.323 84.354,180.348 84.352,180.352 84.348,180.354 84.323,180.328 83.46,181.191 83.46,186.04 137.04,186.04

## Other copper
GND (plane layer: these items are gaps in the copper):
  pour cut-out: 98.11,149.52 98.11,147.77 99.743,147.77 99.743,149.52
  pour cut-out: 98.11,147.27 98.11,145.52 99.743,145.52 99.743,147.27
  pour cut-out: 98.11,145.02 98.11,143.27 99.743,143.27 99.743,145.02
  pour cut-out: 97.85,167.528 97.85,165.778 99.48,165.778 99.48,167.528
  pour cut-out: 97.85,165.278 97.85,163.528 99.48,163.528 99.48,165.278
PWR (plane layer: these items are gaps in the copper):
  pour cut-out: 101.257,163.578 97.58,163.578 97.58,165.22 101.257,165.22
  pour cut-out: 101.52,147.82 97.843,147.82 97.843,149.47 101.52,149.47
  pour cut-out: 101.52,145.57 97.843,145.57 97.843,147.22 101.52,147.22
  pour cut-out: 101.52,143.32 97.843,143.32 97.843,144.97 101.52,144.97
  pour cut-out: 101.52,141.07 97.843,141.07 97.843,142.72 101.52,142.72
  pour cut-out: 101.52,136.57 97.843,136.57 97.843,138.22 101.52,138.22
  pour cut-out: 101.52,134.32 97.843,134.32 97.843,135.97 101.52,135.97
  pour cut-out: 101.52,132.07 97.843,132.07 97.843,133.72 101.52,133.72
  pour cut-out: 101.52,129.82 97.843,129.82 97.843,131.47 101.52,131.47
  pour cut-out: 99.795,158.45 101.41,158.45 101.41,156.8 99.795,156.8
  pour cut-out: 99.299,160.708 101.41,160.708 101.41,159.058 99.299,159.058
  pour cut-out: 101.257,165.828 97.58,165.828 97.58,167.47 101.257,167.47
  pour cut-out: 99.798,171.97 101.659,171.97 101.659,170.32 99.798,170.32
  pour cut-out: 99.798,174.22 101.659,174.22 101.659,172.57 99.798,172.57
  pour cut-out: 106.605,156.82 104.743,156.82 104.743,158.47 106.605,158.47
  pour cut-out: 106.605,154.57 104.743,154.57 104.743,156.22 106.605,156.22
  pour cut-out: 106.605,152.32 104.743,152.32 104.743,153.97 106.605,153.97
  pour cut-out: 104.6,151.7 106.462,151.7 106.462,150.1 104.6,150.1
  pour cut-out: 106.605,147.84 104.46,147.84 104.46,149.44 106.605,149.44
  pour cut-out: 104.743,147.22 106.605,147.22 106.605,145.57 104.743,145.57
  pour cut-out: 106.605,143.32 104.743,143.32 104.743,144.97 106.605,144.97
  pour cut-out: 104.743,142.72 106.605,142.72 106.605,141.07 104.743,141.07
  pour cut-out: 106.605,138.82 104.743,138.82 104.743,140.47 106.605,140.47
  pour cut-out: 104.743,138.22 106.605,138.22 106.605,136.57 104.743,136.57
  pour cut-out: 106.605,134.32 104.743,134.32 104.743,135.97 106.605,135.97
  pour cut-out: 104.743,133.72 106.605,133.72 106.605,132.07 104.743,132.07
  pour cut-out: 104.743,129.22 106.605,129.22 106.605,127.57 104.743,127.57
  pour cut-out: 106.605,129.82 104.743,129.82 104.743,131.47 106.605,131.47
  pour cut-out: 106.605,118.57 104.743,118.57 104.743,120.22 106.605,120.22
  pour cut-out: 106.605,120.82 104.743,120.82 104.743,122.47 106.605,122.47
  pour cut-out: 106.605,123.07 104.743,123.07 104.743,124.72 106.605,124.72
  pour cut-out: 106.605,125.32 104.743,125.32 104.743,126.97 106.605,126.97
  pour cut-out: 99.743,124.72 101.605,124.72 101.605,123.07 99.743,123.07
  pour cut-out: 99.743,126.97 101.605,126.97 101.605,125.32 99.743,125.32

## Silkscreen, mask and mechanical layers (free items; w line width, h text height)
Top Overlay:
  text "AFC P3" at 105.149,165.307 h1 r90
  text "ACC P3" at 105.307,138.7 h1 r90
OUTLINE:
  lines w0.1: 83,104 83.011,104.011 ; 137.5,185 137.5,186 ; 83.011,104.011 137.532,104.011 137.5,104.043 137.5,108.5 133.5,112.5 133.5,176.5 137.5,180.5 137.5,186.5 83,186.5 83,181 84,180 85,179 85,112 83.011,110.011 83.011,104.011
Mechanical 8:
  lines w0.1: 86,107 148,107 ; 86,183 146,183 ; 111,99 111,183

## Text inside footprints (layer, text, board x,y; h text height)
J3: Bottom Overlay "40P" at 123.55,179.5 h0.89 r270; Bottom Overlay "1" at 123.6,159.1 h0.89 r270
JMP1: Bottom Overlay "1" at 94.5,163 h1.52 r270
JMP3: Bottom Overlay "1" at 94.5,112.5 h1.52 r270
JMP5: Bottom Overlay "1" at 94.5,145 h1.52 r270
JMP7: Bottom Overlay "1" at 94.5,128.5 h1.52 r270